# Altium PCB PCB2.PcbDoc
Units mil, origin at the board's own origin, x right, y up, seen from the top; angles counter-clockwise.
Board outline 2120 x 2135 mil, 4 copper layers (Top Layer, Mid-Layer 1, Mid-Layer 2, Bottom Layer); 57 components, 81 nets, 260 pads, 8 vias.
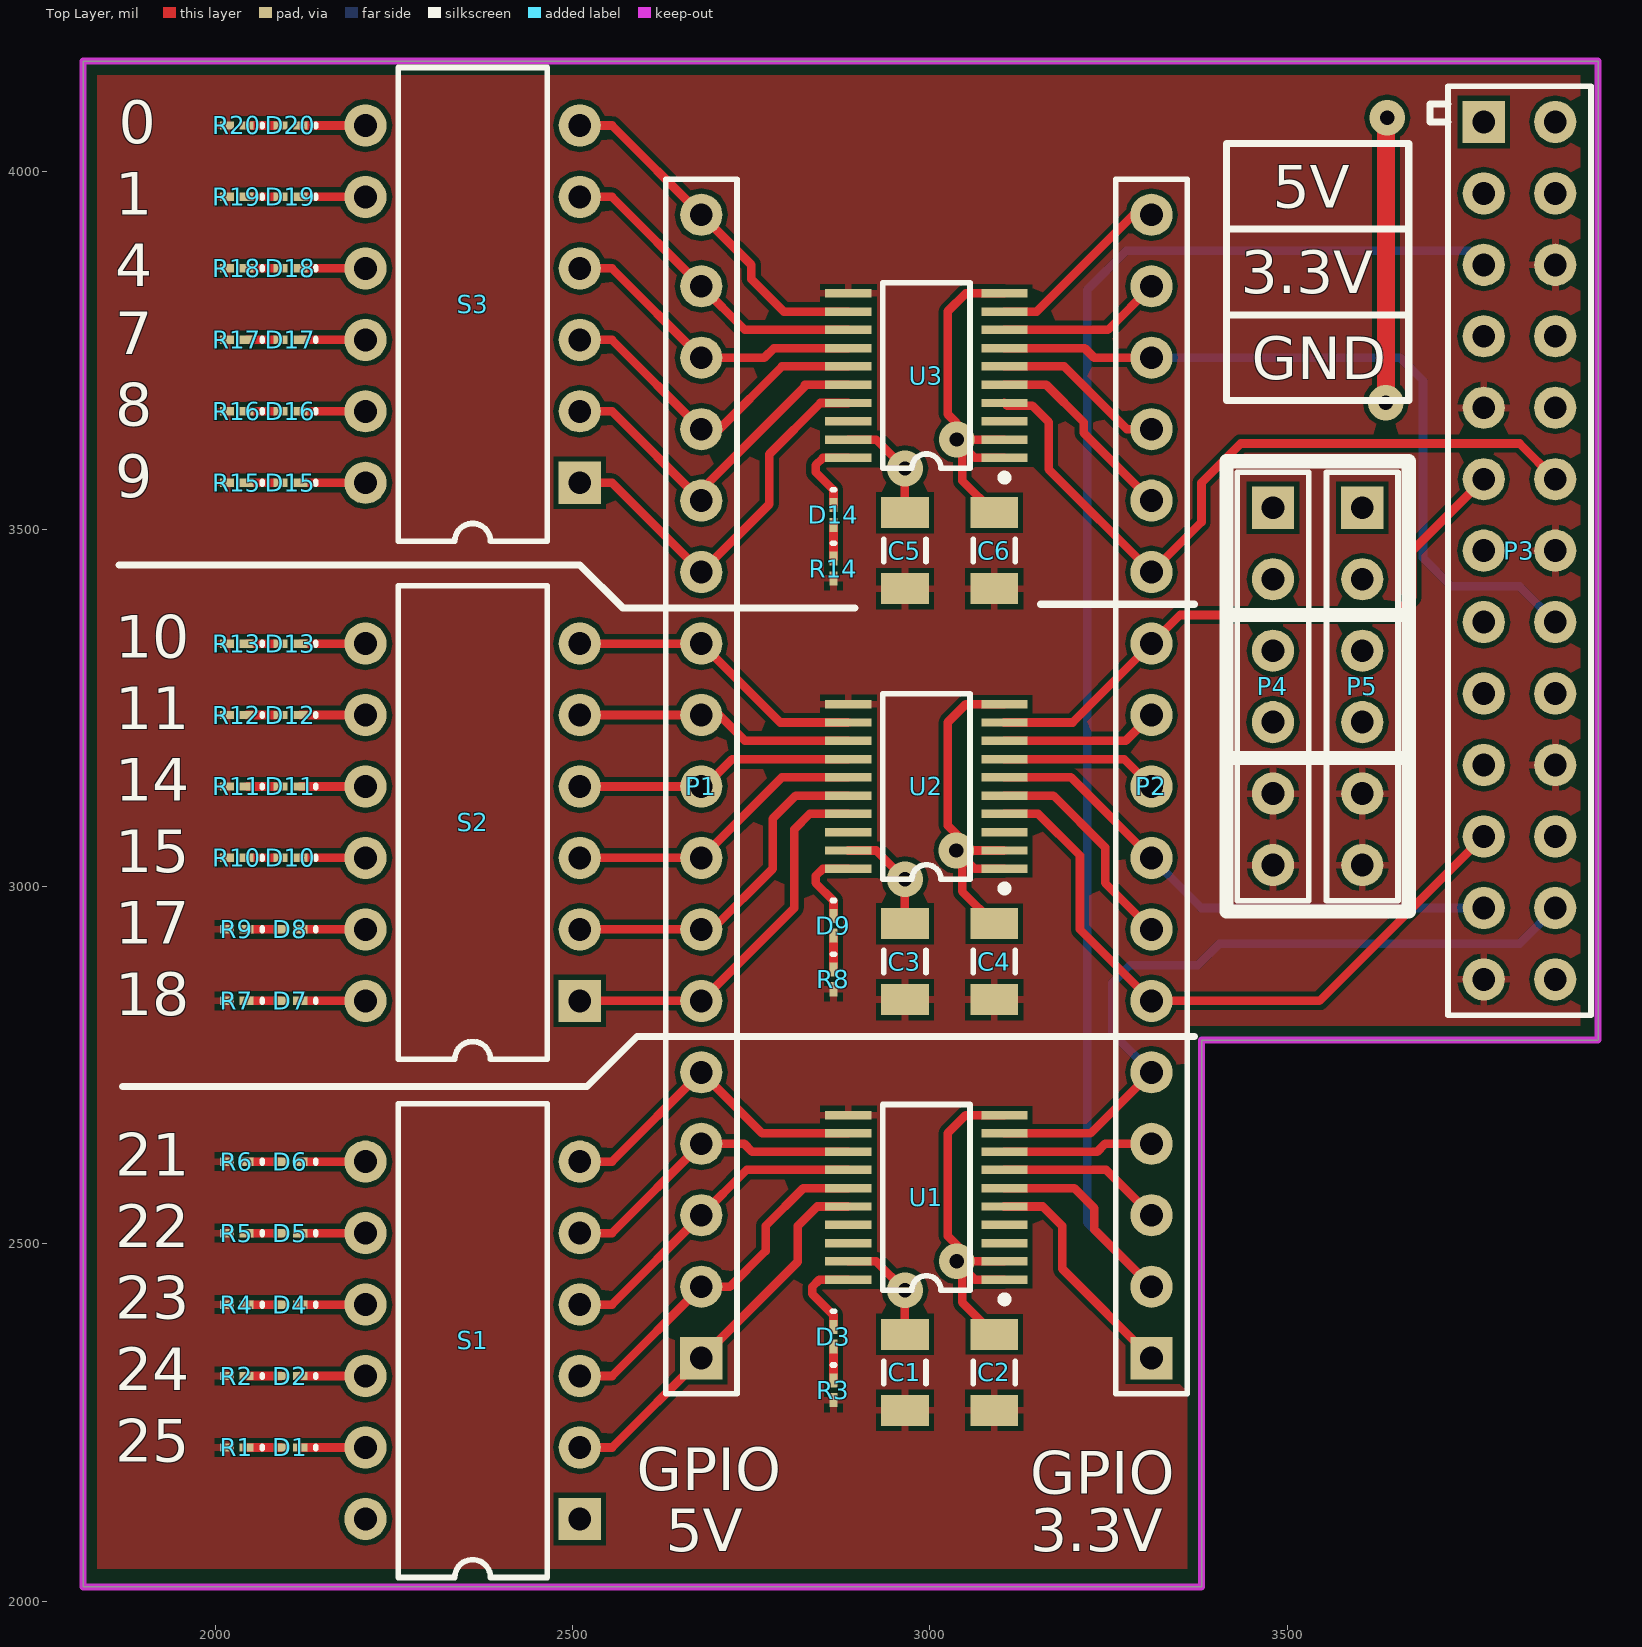
[diagram p0: Top Layer view]
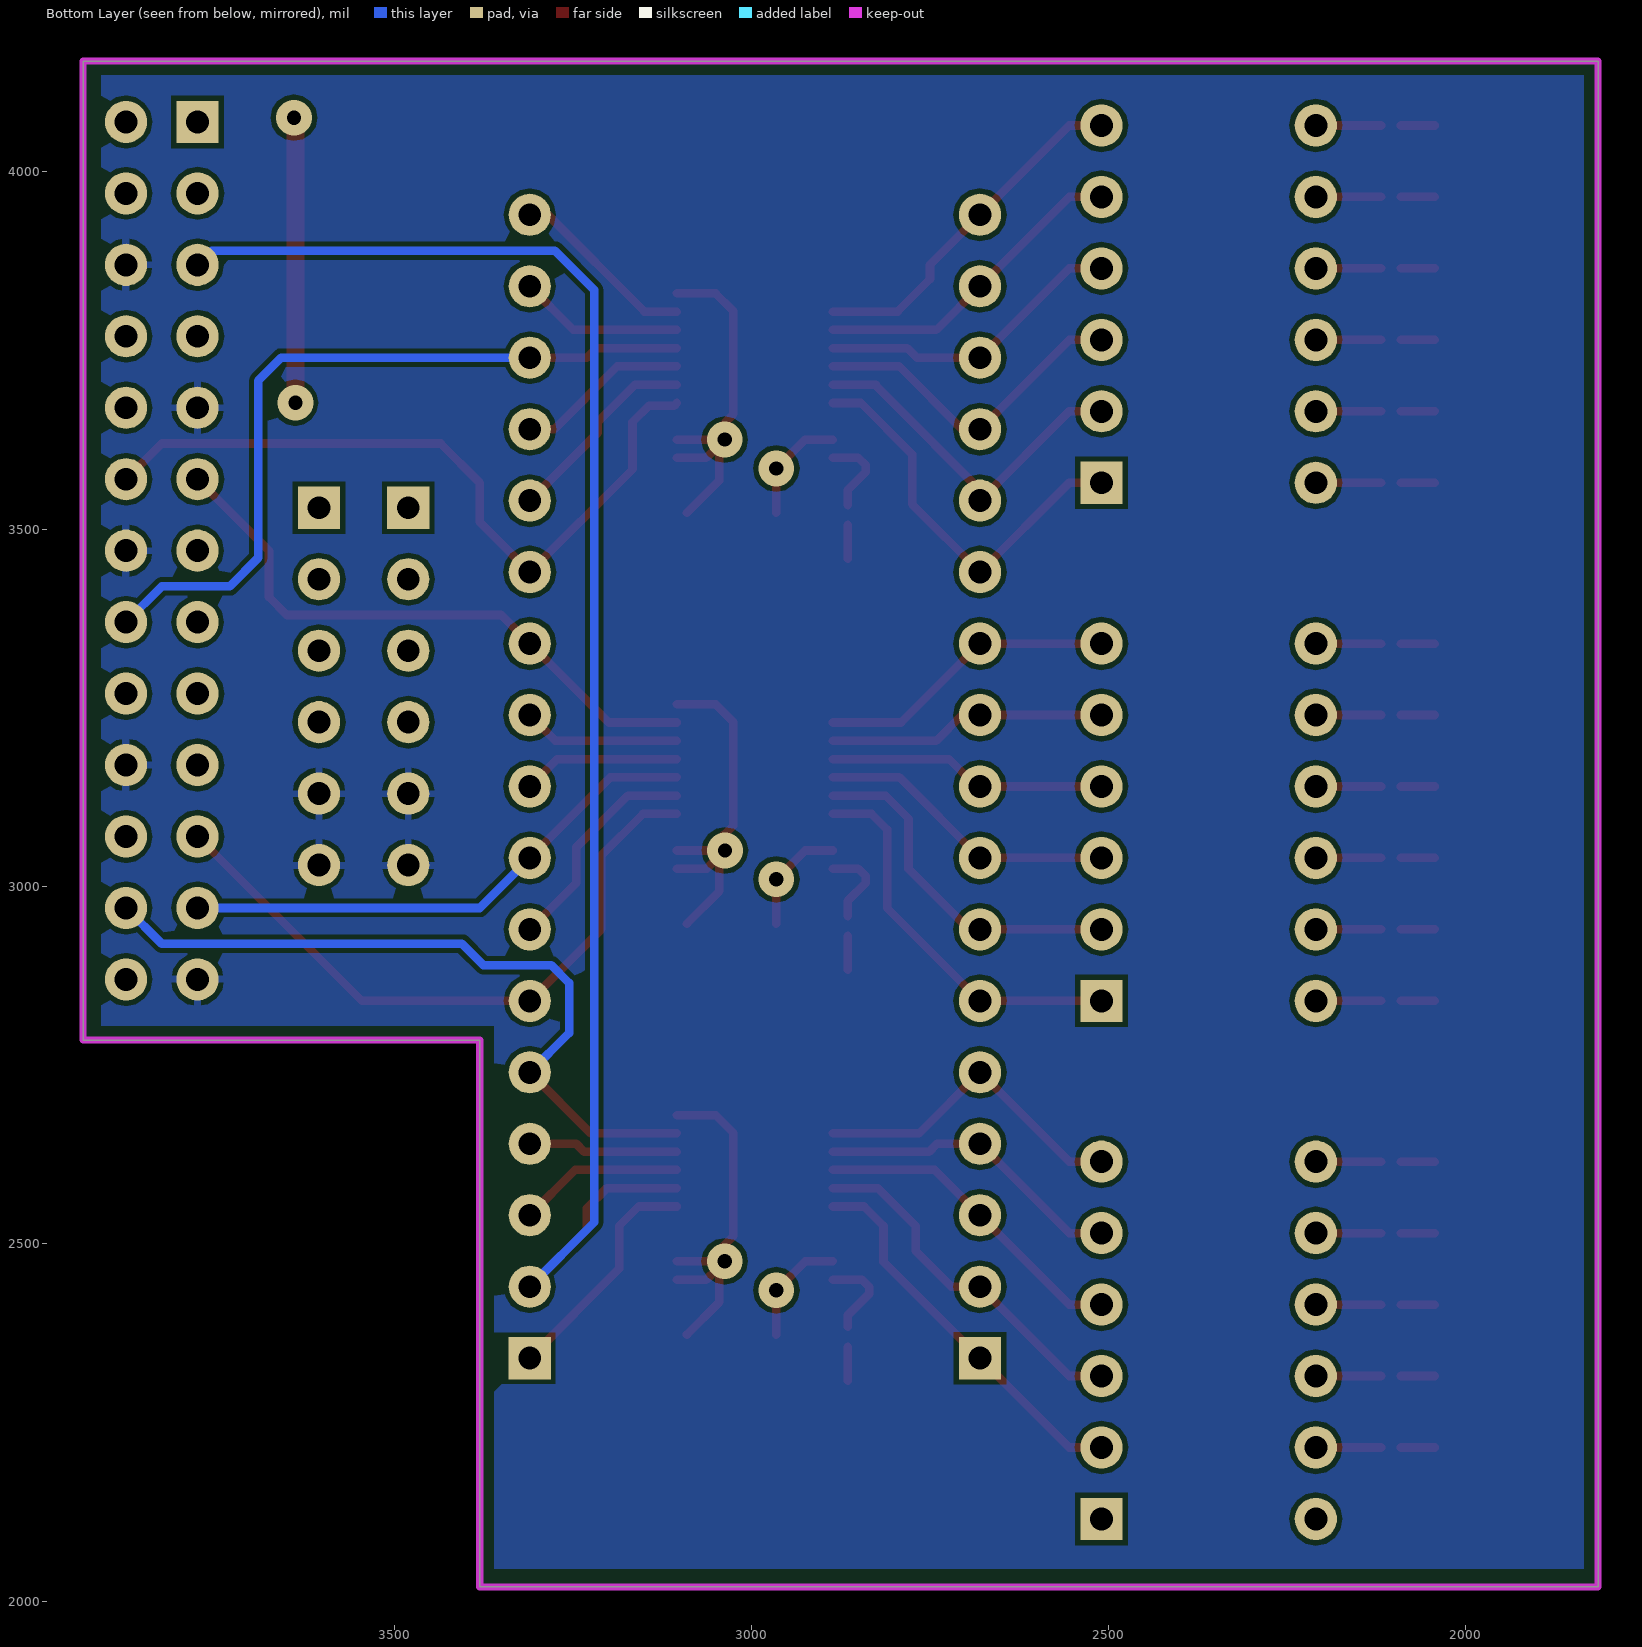
[diagram p1: Bottom Layer view, seen from below]
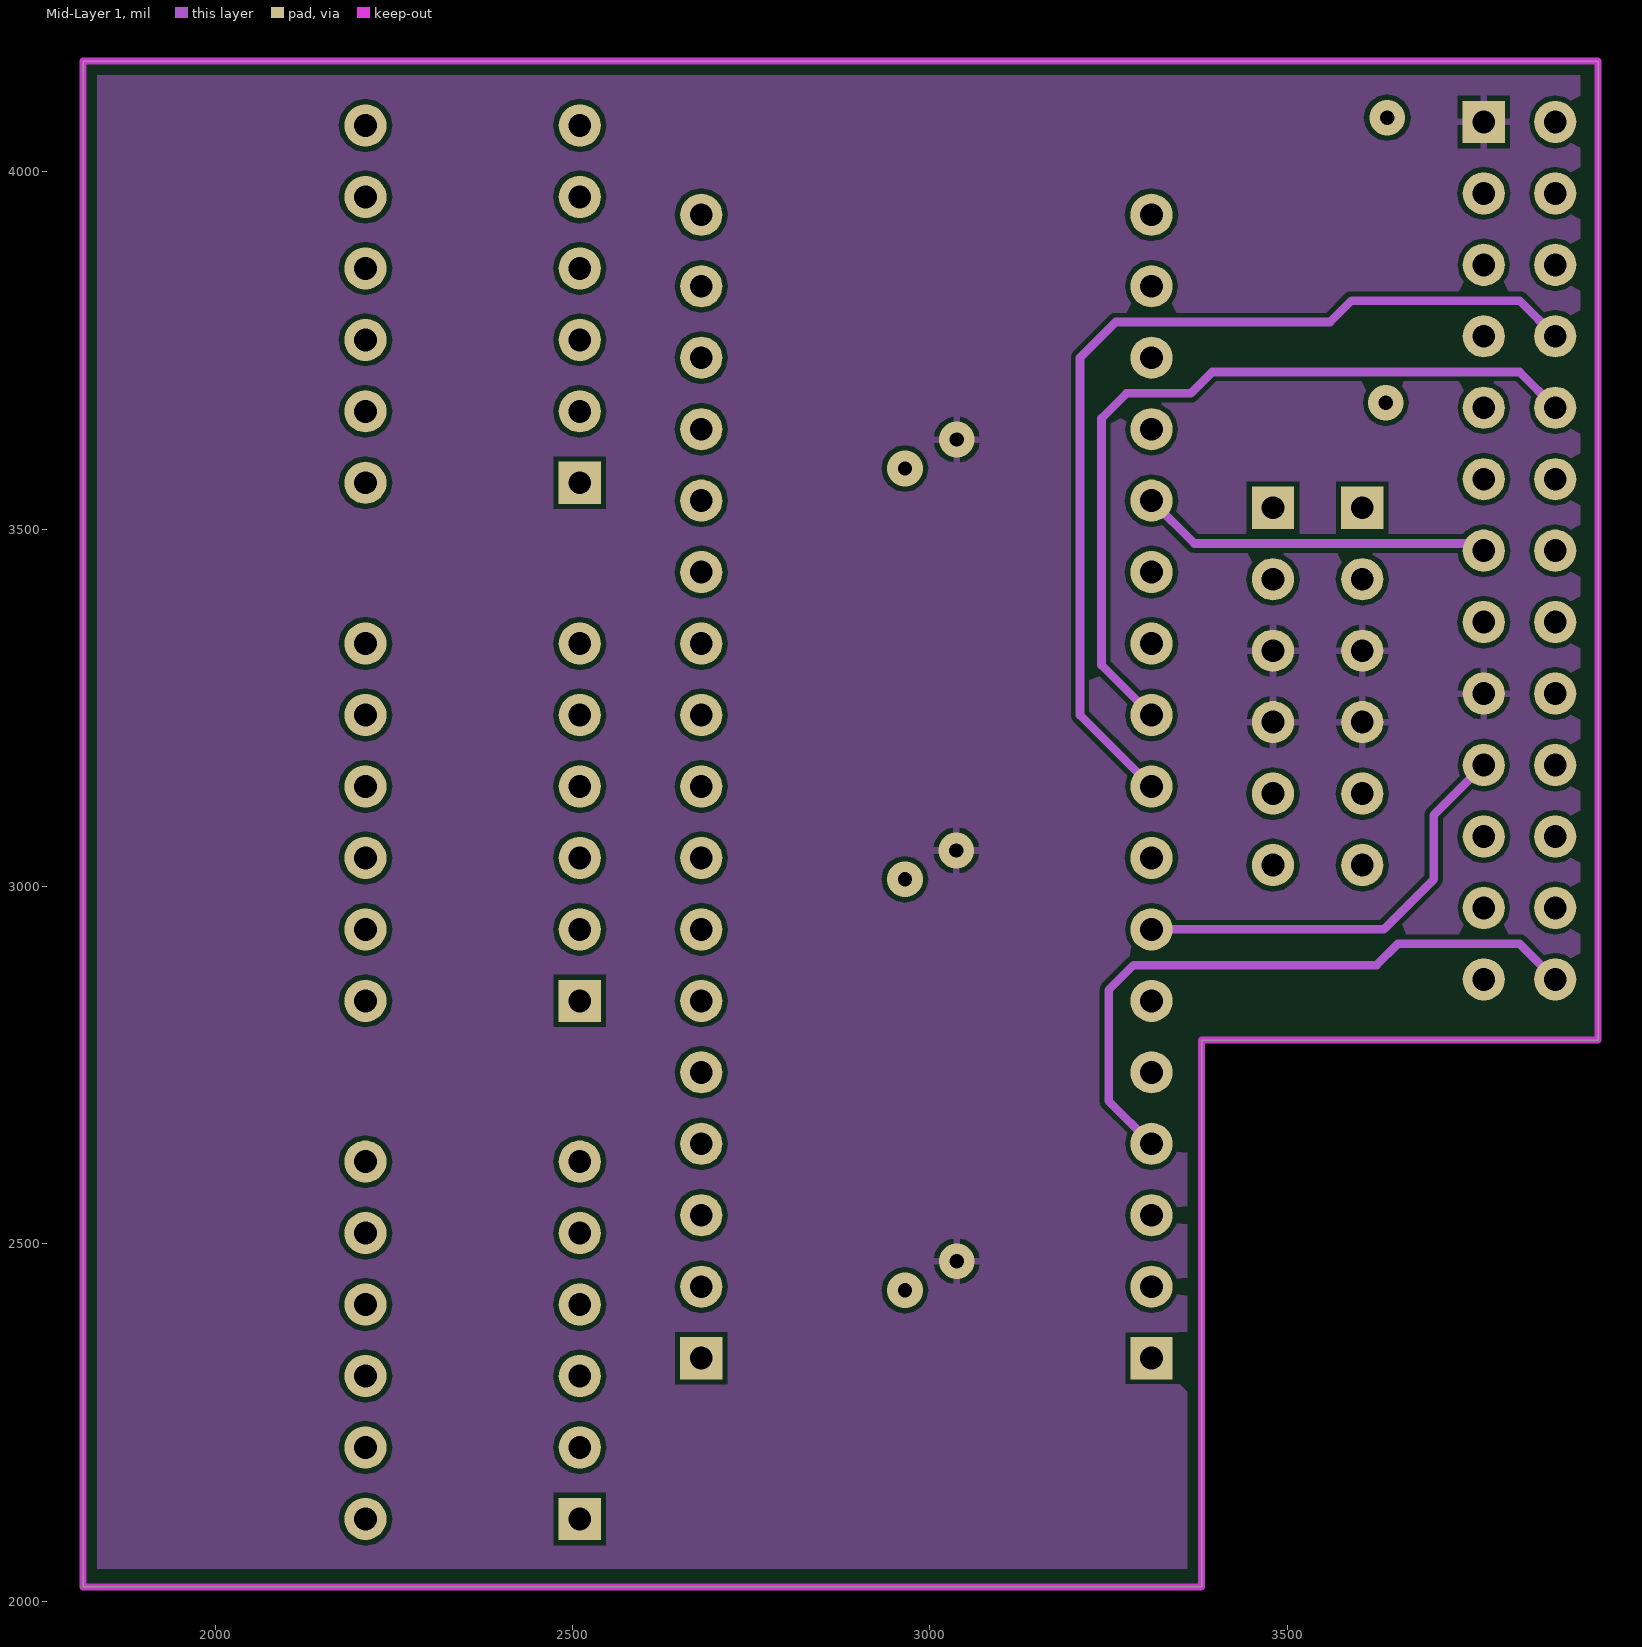
[diagram p2: Mid-Layer 1]
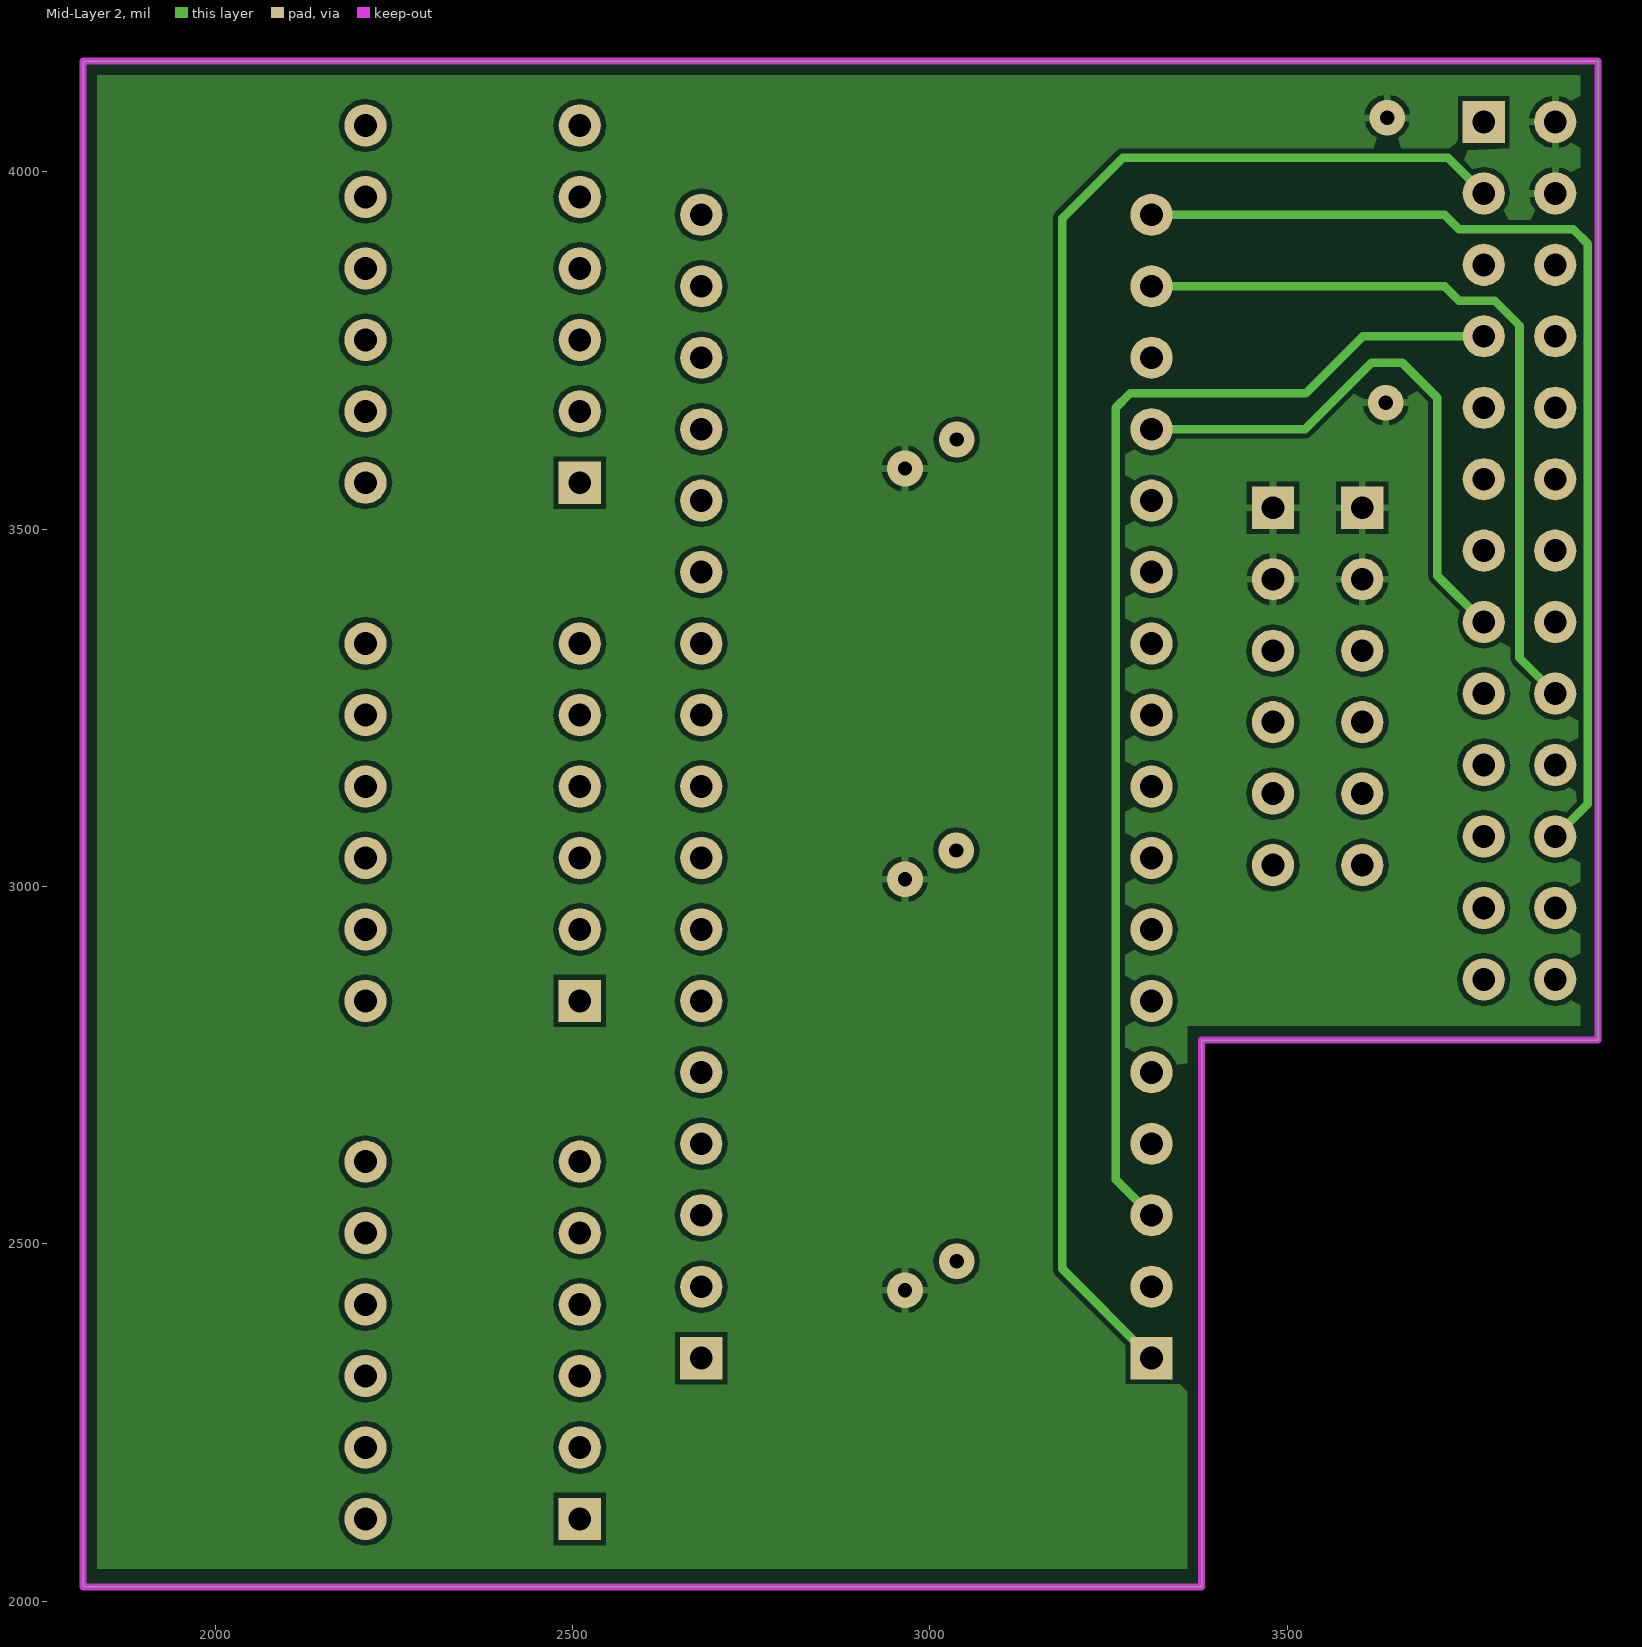
[diagram p3: Mid-Layer 2]

## Layer stack, top to bottom
Top Layer: signal copper 1.4
Dielectric: core 12.6, FR-4, Dk 4.8
Mid-Layer 1: signal copper 1.4
Dielectric: prepreg 12.6, FR-4, Dk 4.8
Mid-Layer 2: signal copper 1.4
Dielectric: core 12.6, FR-4, Dk 4.8
Bottom Layer: signal copper 1.4

## Board outline
3380,2020 3380,2785 3935,2785 3935,4155 1815,4155 1815,2020

## Design rules (kind name [scope] priority, off if disabled: settings)
Clearance [All] p1: gap=7
MinimumSolderMaskSliver [All] p1: minsoldermaskwidth=6
PolygonConnect [All] p1: connectstyle=Relief reliefconductorwidth=10 reliefentries=4 polygonreliefangle="90 Angle"
RoutingVias [All] p1: holewidth=28 width=50 viastyle="Through Hole" minholewidth=28 minwidth=50 maxholewidth=28 maxwidth=50
SilkscreenOverComponentPads [All] p1 off: minsilkscreentomaskgap=10
SolderMaskExpansion [All] p1: expansion=4
Width [All] p1: maxlimit=40 minlimit=9 preferedwidth=20
26 further rules are at their usual default settings.

## Components (designator, comment, footprint, x,y, rotation, side; value= is the part's Value field where it differs from the comment)
C1 "Cap Semi" C1206 2965,2320 r90 top
C2 "Cap Semi" C1206 3090,2320 r90 top
C3 "Cap Semi" C1206 2965,2895 r90 top
C4 "Cap Semi" C1206 3090,2895 r90 top
C5 "Cap Semi" C1206 2965,3470 r90 top
C6 "Cap Semi" C1206 3090,3470 r90 top
D1 "LED2" 0603 2105,2215 r180 top (schematic designator D2)
D2 "LED2" 0603 2105,2315 r180 top (schematic designator D3)
D3 "LED2" 0603 2865,2370 r270 top (schematic designator D1)
D4 "LED2" 0603 2105,2415 r180 top
D5 "LED2" 0603 2105,2515 r180 top
D6 "LED2" 0603 2105,2615 r180 top
D7 "LED2" 0603 2105,2840 r180 top (schematic designator D8)
D8 "LED2" 0603 2105,2940 r180 top (schematic designator D9)
D9 "LED2" 0603 2865,2945 r270 top (schematic designator D7)
D10 "LED2" 0603 2105,3040 r180 top
D11 "LED2" 0603 2105,3140 r180 top
D12 "LED2" 0603 2105,3240 r180 top
D13 "LED2" 0603 2105,3340 r180 top
D14 "LED2" 0603 2865,3520 r270 top (schematic designator D16)
D15 "LED2" 0603 2105,3565 r180 top (schematic designator D14)
D16 "LED2" 0603 2105,3665 r180 top (schematic designator D15)
D17 "LED2" 0603 2105,3765 r180 top
D18 "LED2" 0603 2105,3865 r180 top
D19 "LED2" 0603 2105,3965 r180 top
D20 "LED2" 0603 2105,4065 r180 top
P1 "Header 17" HDR1X17 2680,2340 r90 top (schematic designator P2)
P2 "Header 17" HDR1X17 3310,2340 r90 top (schematic designator P3)
P3 "Header 13X2" HDR2X13 3775,4070 r270 top (schematic designator P1)
P4 "Header 6" HDR1X6 3480,3530 r270 top
P5 "Header 6" HDR1X6 3605,3530 r270 top
R1 "Res1" 0603 2030,2215 r180 top (schematic designator R2)
R2 "Res1" 0603 2030,2315 r180 top (schematic designator R3)
R3 "Res1" 0603 2865,2295 r270 top (schematic designator R1)
R4 "Res1" 0603 2030,2415 r180 top
R5 "Res1" 0603 2030,2515 r180 top
R6 "Res1" 0603 2030,2615 r180 top
R7 "Res1" 0603 2030,2840 r180 top (schematic designator R8)
R8 "Res1" 0603 2865,2870 r270 top (schematic designator R7)
R9 "Res1" 0603 2030,2940 r180 top
R10 "Res1" 0603 2030,3040 r180 top
R11 "Res1" 0603 2030,3140 r180 top
R12 "Res1" 0603 2030,3240 r180 top
R13 "Res1" 0603 2030,3340 r180 top
R14 "Res1" 0603 2865,3445 r270 top (schematic designator R16)
R15 "Res1" 0603 2030,3565 r180 top (schematic designator R14)
R16 "Res1" 0603 2030,3665 r180 top (schematic designator R15)
R17 "Res1" 0603 2030,3765 r180 top
R18 "Res1" 0603 2030,3865 r180 top
R19 "Res1" 0603 2030,3965 r180 top
R20 "Res1" 0603 2030,4065 r180 top
S1 "SW DIP-6" DIP-12/SW 2360,2365 r90 top
S2 "SW DIP-6" DIP-12/SW 2360,3090 r90 top
S3 "SW DIP-6" DIP-12/SW 2360,3815 r90 top
U1 "SN74ABT245APW" PW020 2995,2565 r90 top
U2 "SN74ABT245APW" PW020 2995,3140 r90 top
U3 "SN74ABT245APW" PW020 2995,3715 r90 top

## Footprints (in the part's own frame and the unit in brackets; to place one, negate y for a bottom-side part, rotate by r counter-clockwise, add the part's x,y. Pads: shape width x height; smd on the part's side, far side on the other; paste and mask are expansions set on the pad)
0603 [mm] "Chip Inductor, Body 0.6x0.3mm, IPC High Density"
  rect 0.5x0.3 smd: 1(-0.35,0) 2(0.35,0)
  silkscreen extent -0.9,-0.05 -0.9,0.05, body extent -0.33,-0.18 0.33,0.18, height 0.55
C1206 [mm] "Chip Capacitor, Body 3.2x1.6mm, IPC High Density"
  rect 1.1x1.7 smd: 1(-1.35,0) 2(1.35,0)
  silkscreen extent -0.4,-0.75 0.4,0.75, body extent -1.7,-0.9 1.7,0.9, height 1.3
DIP-12/SW [mm] "DIP Switch; 12 Leads"
  rect 1.5x1.5 hole 0.813: 1(-6.35,-3.81)
  round 1.5 hole 0.813: 2(-3.81,-3.81) 3(-1.27,-3.81) 4(1.27,-3.81) 5(3.81,-3.81) 6(6.35,-3.81) 7(6.35,3.81) 8(3.81,3.81) 9(1.27,3.81) 10(-1.27,3.81) 11(-3.81,3.81) 12(-6.35,3.81)
  silkscreen extent -8.43,-2.65 8.41,2.65
HDR1X6 [mm] "Connector; Header; 6 Position"
  rect 1.5x1.5 hole 0.813: 1(0,0)
  round 1.5 hole 0.813: 2(2.54,0) 3(5.08,0) 4(7.62,0) 5(10.16,0) 6(12.7,0)
  silkscreen extent -1.27,-1.27 13.97,1.27
HDR1X17 [mm] "Connector; Header; 17 Position"
  rect 1.5x1.5 hole 0.813: 1(0,0)
  round 1.5 hole 0.813: 2(2.54,0) 3(5.08,0) 4(7.62,0) 5(10.16,0) 6(12.7,0) 7(15.24,0) 8(17.78,0) 9(20.32,0) 10(22.86,0) 11(25.4,0) 12(27.94,0) 13(30.48,0) 14(33.02,0) 15(35.56,0) 16(38.1,0) 17(40.64,0)
  silkscreen extent -1.27,-1.27 41.91,1.27
HDR2X13 [mm] "Connector; Header; 13x2 Position"
  rect 1.5x1.5 hole 0.813: 1(0,0)
  round 1.5 hole 0.813: 2(0,2.54) 3(2.54,0) 4(2.54,2.54) 5(5.08,0) 6(5.08,2.54) 7(7.62,0) 8(7.62,2.54) 9(10.16,0) 10(10.16,2.54) 11(12.7,0) 12(12.7,2.54) 13(15.24,0) 14(15.24,2.54) 15(17.78,0) 16(17.78,2.54) 17(20.32,0) 18(20.32,2.54) 19(22.86,0) 20(22.86,2.54) 21(25.4,0) 22(25.4,2.54) 23(27.94,0) 24(27.94,2.54) 25(30.48,0) 26(30.48,2.54)
  silkscreen extent -1.27,-1.27 31.75,3.81
PW020 [mm] "Shrink Small Outline; 20 Leads; Body Width 4.4 mm; Pitch 0.65 mm"
  rect 0.3x1.65 smd: 1(-2.925,-2.775) 2(-2.275,-2.775) 3(-1.625,-2.775) 4(-0.975,-2.775) 5(-0.325,-2.775) 6(0.325,-2.775) 7(0.975,-2.775) 8(1.625,-2.775) 9(2.275,-2.775) 10(2.925,-2.775) 11(2.925,2.775) 12(2.275,2.775) 13(1.625,2.775) 14(0.975,2.775) 15(0.325,2.775) 16(-0.325,2.775) 17(-0.975,2.775) 18(-1.625,2.775) 19(-2.275,2.775) 20(-2.925,2.775)
  silkscreen extent -3.75,-2.9 3.3,1.55

## Part data
C1 C2 C3 C4 C5 C6: "Capacitor (Semiconductor SIM Model)"
D1 D2 D3 D4 D5 D6 D7 D8 D9 D10 D11 D12 D13 D14 D15 D16 D17 D18 D19 D20: "Typical RED, GREEN, YELLOW, AMBER GaAs LED"
P1 P2: "Header, 17-Pin"
P3: "Header, 13-Pin, Dual row"
P4 P5: "Header, 6-Pin"
R1 R2 R3 R4 R5 R6 R7 R8 R9 R10 R11 R12 R13 R14 R15 R16 R17 R18 R19 R20: "Resistor"
S1 S2 S3: "DIP Switch, 6 Position, SPST"
U1 U2 U3: "Octal Bus Transceiver with 3-State Outputs"

## Via types
v1: diameter 50, hole 20, Top Layer to Bottom Layer, 8 vias

## Nets (pads, with @x,y where several pads share a name; then routed paths per layer and width w, separated by ;. In a path a pad name is that pad's centre, name@x,y a point inside that pad or via, vN(x,y) a via of type N, cw(c..) or ccw(c..) an arc to the next point about the centre after c; other vN are vias at no path point)
1: P1.1 S1.2 U1.16 | length 544.7
  Top Layer w12: S1.2 2555,2215 P1.1 2815,2475 2815,2525 2842.2,2552.2 U1.16
2: P1.2 S1.3 U1.15 | length 505.1
  Top Layer w12: S1.3 2555,2315 P1.2 2720,2440 2770,2490 2770,2525 2822.8,2577.8 U1.15
3: P1.3 S1.4 U1.14 | length 453.8
  Top Layer w12: S1.4 2555,2415 P1.3 2743.39,2603.39 U1.14
3V3: C2.2 C4.2 C6.2 P3.1 P3.17 P4.3 P4.4 P5.3 P5.4 U1.1 U1.2 U1.10 U2.1 U2.2 U2.10 U3.1 U3.2 U3.10 | length 1500.2
  Top Layer w12: v1(3036.93,3050.43) v1@3048.46,3038.9 ; v1(3037.36,2475.43) v1@3048.9,2463.9 ; v1(3037.36,3625.43) v1@3048.9,3613.9 ; v1@3048.46,3061.97 3025,3085.43 3025,3230 3050.16,3255.16 U2.10 ; v1@3048.9,2486.97 3025,2510.87 3025,2655 3050.16,2680.16 U1.10 ; v1@3048.9,3636.97 3025,3660.87 3025,3805 3050,3830 3104.09,3830 U3.10 ; v1@3060,3050.43 U2.2 ; v1@3060.43,2475.43 U1.2 ; v1@3060.43,3625.43 U3.2 ; C2.2 3045,2418.15 3045,2460 v1@3048.9,2463.9 ; C4.2 3045,2993.15 3045,3035.43 v1@3048.46,3038.9 ; C6.2 3045,3568.15 3045,3610 v1@3048.9,3613.9 ; U1.1 3062.95,2449.84 v1@3048.9,2463.9 ; U2.1 3062.52,3024.84 v1@3048.46,3038.9 ; U3.1 3062.95,3599.84 v1@3048.9,3613.9
4: P1.4 S1.5 U1.13 | length 432.1
  Top Layer w12: S1.5 2555,2515 P1.4 2740,2640 2751.02,2628.98 U1.13
5: P1.5 S1.6 U1.12 | length 462.9
  Top Layer w12: S1.6 2555,2615 P1.5 2765.43,2654.57 U1.12
5V: C1.2 C3.2 C5.2 P3.2 P3.4 P4.1 P4.2 P5.1 P5.2 U1.19 U2.19 U3.19 | length 861.6
  Top Layer w12: U1.19 2924.57,2475.43 v1(2965,2435) C1.2 ; U2.19 2924.57,3050.43 v1(2965,3010) C3.2 ; U3.19 2924.57,3625.43 v1(2965,3585) C5.2
  Top Layer w25: v1(3638,3677) v1@3638,4065
  other v1: 3640,4076
6: P1.6 S2.1 U2.17 | length 548.5
  Top Layer w12: S2.1 P1.6 2810,2970 2810,3080 2831.61,3101.61 U2.17
7: P1.7 S2.2 U2.16 | length 494.3
  Top Layer w12: S2.2 P1.7 2695,2940 2780,3025 2780,3095 2812.2,3127.2 U2.16
8: P1.8 S2.3 U2.15 | length 422.5
  Top Layer w12: S2.3 P1.8 2792.8,3152.8 U2.15
9: P1.9 S2.4 U2.14 | length 391.6
  Top Layer w12: S2.4 P1.9 2685,3140 2723.39,3178.39 U2.14
10: P1.10 S2.5 U2.13 | length 390.7
  Top Layer w12: S2.5 P1.10 2705,3240 2741.02,3203.98 U2.13
11: P1.11 S2.6 U2.12 | length 421.5
  Top Layer w12: S2.6 P1.11 2790.43,3229.57 U2.12
12: P1.12 S3.1 U3.17 | length 566.5
  Top Layer w12: S3.1 2555,3565 P1.12 2775,3535 2775,3605 2846.61,3676.61 U3.17
13: P1.13 S3.2 U3.16 | length 511.9
  Top Layer w12: S3.2 2555,3665 P1.13 ; P1.13@2662.8,3537.8 2825,3700 ; 2825,3702.2 U3.16
14: P1.14 S3.3 U3.15 | length 463.9
  Top Layer w12: S3.3 2555,3765 P1.14 2705,3640 2792.8,3727.8 U3.15
15: P1.15 S3.4 U3.14 | length 433.1
  Top Layer w12: S3.4 2555,3865 P1.15 2768.23,3740 2781.61,3753.39 U3.14
16: P1.16 S3.5 U3.13 | length 452.8
  Top Layer w12: S3.5 2555,3965 P1.16 2741.02,3778.98 U3.13
17: P1.17 S3.6 U3.12 | length 495.3
  Top Layer w12: S3.6 2555,4065 P1.17 2750,3870 2750,3850 2795.43,3804.57 U3.12
A2: U1.3
A3: U1.4
A4: P2.1 P3.3 U1.5 | length 2621.5
  Top Layer w12: U1.5 3157.8,2552.2 3185,2525 3185,2465 P2.1
  Mid-Layer 2 w12: P2.1 3185,2465 3185,3935 3270,4020 3725,4020 P3.3
A5: P2.2 P3.5 U1.6 | length 2298.7
  Top Layer w12: U1.6 3202.2,2577.8 3230,2550 3230,2520 P2.2
  Bottom Layer w12: P2.2 3220,2530 3220,3835 3275,3890 3755,3890 P3.5
A6: P2.3 P3.7 U1.7 | length 1939.1
  Top Layer w12: U1.7 3246.61,2603.39 P2.3
  Mid-Layer 2 w12: P2.3 3260,2590 3260,3670 3280,3690 3526,3690 3606,3770 P3.7
A7: P2.4 P3.26 U1.8 | length 1122.8
  Top Layer w12: U1.8 3233.98,2628.98 3245,2640 P2.4
  Mid-Layer 1 w12: P2.4 3250,2700 3250,2855 3285,2890 3625,2890 3655,2920 3825,2920 P3.26
A8: P2.5 P3.24 U1.9 | length 1052.4
  Top Layer w12: U1.9 3224.57,2654.57 P2.5
  Bottom Layer w12: P2.5 3255,2795 3255,2865 3280,2890 3375,2890 3405,2920 3825,2920 P3.24
B1: D3.1 U1.20 | length 123.3
  Top Layer w12: D3.1 2865,2400 2835,2430 2835,2439.68 2845.16,2449.84 U1.20
B2: U1.18
B3: U1.17
GND: C1.1 C2.1 C3.1 C4.1 C5.1 C6.1 P3.6 P3.9 P3.14 P3.20 P3.25 P4.5 P4.6 P5.5 P5.6 R1.2 R2.2 R3.2 R4.2 R5.2 R6.2 R7.2 R8.2 R9.2 R10.2 R11.2 R12.2 R13.2 R14.2 R15.2 R16.2 R17.2 R18.2 R19.2 R20.2 U1.11 U2.11 U3.11
GPIO9: P2.6 P3.21 U2.4 | length 934.9
  Top Layer w12: U2.4 3151.61,3101.61 3210,3043.23 3210,2940 P2.6 3545,2840 P3.21
GPIO10: P2.7 P3.19 U2.5 | length 925.6
  Top Layer w12: U2.5 3172.8,3127.2 3245,3055 3245,3005 P2.7
  Mid-Layer 1 w12: P2.7 3635,2940 3705,3010 3705,3100 P3.19
GPIO11: P2.8 P3.23 U2.6 | length 746.5
  Top Layer w12: U2.6 3197.2,3152.8 P2.8
  Bottom Layer w12: P2.8 3380,2970 P3.23
GPIO14: P2.9 P3.8 U2.7 | length 1581.9
  Top Layer w12: U2.7 3271.61,3178.39 P2.9
  Mid-Layer 1 w12: P2.9 3210,3240 3210,3740 3260,3790 3560,3790 3590,3820 3825,3820 P3.8
GPIO15: P2.10 P3.10 U2.8 | length 1347.3
  Top Layer w12: U2.8 3273.98,3203.98 P2.10
  Mid-Layer 1 w12: P2.10 3240,3310 3240,3655 3275,3690 3365,3690 3395,3720 3825,3720 P3.10
GPIO17: P2.11 P3.11 U2.9 | length 859.8
  Top Layer w12: U2.9 3199.57,3229.57 P2.11 3350,3380 3650,3380 3675,3405 3675,3470 P3.11
  Mid-Layer 1 w12: P3.11@3765,3570 P3.11
GPIO18: P2.12 P3.12 U3.4 | length 1035.1
  Top Layer w12: U3.4 3107.94,3672.93 3143.36,3672.93 3166.29,3650 3166.29,3583.71 P2.12 3380,3510 3380,3565 3435,3620 3825,3620 P3.12
GPIO21: P2.13 P3.13 U3.5 | length 775.7
  Top Layer w12: U3.5 3162.8,3702.2 3215,3650 3215,3635 P2.13
  Mid-Layer 1 w12: P2.13 3370,3480 3765,3480 P3.13
GPIO22: P2.14 P3.15 U3.6 | length 1041.9
  Top Layer w12: U3.6 3187.8,3727.8 3275.59,3640 P2.14
  Mid-Layer 2 w12: P2.14 3525,3640 3618,3733 3661,3733 3710,3684 3710,3435 P3.15
GPIO23: P2.15 P3.16 U3.7 | length 1074.8
  Top Layer w12: U3.7 3216.61,3753.39 3230,3740 P2.15
  Bottom Layer w12: P2.15 3658,3740 3690,3708 3690,3460 3730,3420 3825,3420 P3.16
GPIO24: P2.16 P3.18 U3.8 | length 1304.5
  Top Layer w12: U3.8 3248.98,3778.98 P2.16
  Mid-Layer 2 w12: P2.16 3720,3840 3740,3820 3790,3820 3825,3785 3825,3320 P3.18
GPIO25: P2.17 P3.22 U3.9 | length 1737.5
  Top Layer w12: U3.9 3149.57,3804.57 3285,3940 P2.17
  Mid-Layer 2 w12: P2.17 3720,3940 3740,3920 3900,3920 3920.53,3899.47 3920.53,3115.53 P3.22
NetD1_2: D3.2 R3.1 | length 47.4
  Top Layer w12: R3.1 D3.2
NetD2_1: D1.1 S1.11 | length 91.2
  Top Layer w12: D1.1 S1.11
NetD2_2: D1.2 R1.1 | length 47.4
  Top Layer w12: R1.1 D1.2
NetD3_1: D2.1 S1.10 | length 91.2
  Top Layer w12: D2.1 S1.10
NetD3_2: D2.2 R2.1 | length 47.4
  Top Layer w12: R2.1 D2.2
NetD4_1: D4.1 S1.9 | length 91.2
  Top Layer w12: D4.1 S1.9
NetD4_2: D4.2 R4.1 | length 47.4
  Top Layer w12: R4.1 D4.2
NetD5_1: D5.1 S1.8 | length 91.2
  Top Layer w12: D5.1 S1.8
NetD5_2: D5.2 R5.1 | length 47.4
  Top Layer w12: R5.1 D5.2
NetD6_1: D6.1 S1.7 | length 91.2
  Top Layer w12: D6.1 S1.7
NetD6_2: D6.2 R6.1 | length 47.4
  Top Layer w12: R6.1 D6.2
NetD7_1: D9.1 U2.20 | length 116.2
  Top Layer w12: D9.1 2865,2980 2840,3005 2840,3014.68 2850.16,3024.84 U2.20
NetD7_2: D9.2 R8.1 | length 47.4
  Top Layer w12: R8.1 D9.2
NetD8_1: D7.1 S2.12 | length 91.2
  Top Layer w12: D7.1 S2.12
NetD8_2: D7.2 R7.1 | length 47.4
  Top Layer w12: R7.1 D7.2
NetD9_1: D8.1 S2.11 | length 91.2
  Top Layer w12: D8.1 S2.11
NetD9_2: D8.2 R9.1 | length 47.4
  Top Layer w12: R9.1 D8.2
NetD10_1: D10.1 S2.10 | length 91.2
  Top Layer w12: D10.1 S2.10
NetD10_2: D10.2 R10.1 | length 47.4
  Top Layer w12: R10.1 D10.2
NetD11_1: D11.1 S2.9 | length 91.2
  Top Layer w12: D11.1 S2.9
NetD11_2: D11.2 R11.1 | length 47.4
  Top Layer w12: R11.1 D11.2
NetD12_1: D12.1 S2.8 | length 91.2
  Top Layer w12: D12.1 S2.8
NetD12_2: D12.2 R12.1 | length 47.4
  Top Layer w12: R12.1 D12.2
NetD13_1: D13.1 S2.7 | length 91.2
  Top Layer w12: D13.1 S2.7
NetD13_2: D13.2 R13.1 | length 47.4
  Top Layer w12: R13.1 D13.2
NetD14_1: D15.1 S3.12 | length 91.2
  Top Layer w12: D15.1 S3.12
NetD14_2: D15.2 R15.1 | length 47.4
  Top Layer w12: R15.1 D15.2
NetD15_1: D16.1 S3.11 | length 91.2
  Top Layer w12: D16.1 S3.11
NetD15_2: D16.2 R16.1 | length 47.4
  Top Layer w12: R16.1 D16.2
NetD16_1: D14.1 U3.20 | length 116.2
  Top Layer w12: D14.1 2865,3555 2840,3580 2840,3589.68 2850.16,3599.84 U3.20
NetD16_2: D14.2 R14.1 | length 47.4
  Top Layer w12: R14.1 D14.2
NetD17_1: D17.1 S3.10 | length 91.2
  Top Layer w12: D17.1 S3.10
NetD17_2: D17.2 R17.1 | length 47.4
  Top Layer w12: R17.1 D17.2
NetD18_1: D18.1 S3.9 | length 91.2
  Top Layer w12: D18.1 S3.9
NetD18_2: D18.2 R18.1 | length 47.4
  Top Layer w12: R18.1 D18.2
NetD19_1: D19.1 S3.8 | length 91.2
  Top Layer w12: D19.1 S3.8
NetD19_2: D19.2 R19.1 | length 47.4
  Top Layer w12: R19.1 D19.2
NetD20_1: D20.1 S3.7 | length 91.2
  Top Layer w12: D20.1 S3.7
NetD20_2: D20.2 R20.1 | length 47.4
  Top Layer w12: R20.1 D20.2
pads on no net: S1.1 S1.12 U2.3 U2.18 U3.3 U3.18

## Polygon pours and split planes (outlines as drawn)
GND on Top Layer "Bottom Layer-No Net" (solid, remove dead copper, pour order 4): 1835,2045 3360,2045 3360,2805 3910,2805 3910,4135 1835,4135
3V3 on Mid-Layer 1 "2_3V3" (solid, remove dead copper, pour order 4): 1835,2045 3360,2045 3360,2805 3910,2805 3910,4135 1835,4135
5V on Mid-Layer 2 "3_5V" (solid, remove dead copper, pour order 4): 1835,2045 3360,2045 3360,2805 3910,2805 3910,4135 1835,4135
GND on Bottom Layer "4_GND" (solid, remove dead copper, pour order 4): 1835,2045 3360,2045 3360,2805 3910,2805 3910,4135 1835,4135

## Keep-outs
Keep-Out Layer:
  lines w10: 1815,2020 1815,4155 2275,4155 3935,4155 3935,2785 3380,2785 3380,2045 3380,2020 1815,2020

## Silkscreen, mask and mechanical layers (free items; w line width, h text height)
Top Overlay:
  lines w10: 1865,3450 2510,3450 2570,3390 2895,3390 ; 1870,2720 2520,2720 2590,2790 3370,2790 ; 3155,3395 3370,3395 ; 3415,3800 3670,3800 ; 3415,3920 3670,3920 ; 3725,4070 3700,4070 3700,4095 3725,4095 ; 3415,3680 3670,3680 3670,4040 3415,4040 3415,3680
  lines w20: 3415,3180 3670,3180 ; 3415,3380 3670,3380 ; 3415,2965 3670,2965 3670,3595 3415,3595 3415,2965
  text "0" at 1865,4040 h60
  text "5V" at 3480,3950 h60
  text "1" at 1860,3940 h60
  text "4" at 1860,3840 h60
  text "3.3V" at 3435,3830 h60
  text "7" at 1860,3745 h60
  text "GND" at 3450,3710 h60
  text "8" at 1860,3645 h60
  text "9" at 1860,3545 h60
  text "10" at 1860,3320 h60
  text "11" at 1860,3220 h60
  text "14" at 1860,3120 h60
  text "15" at 1860,3020 h60
  text "17" at 1860,2920 h60
  text "18" at 1860,2820 h60
  text "21" at 1860,2595 h60
  text "22" at 1860,2495 h60
  text "23" at 1860,2395 h60
  text "24" at 1860,2295 h60
  text "25" at 1860,2195 h60
  text "GPIO" at 2590,2155 h60
  text "GPIO" at 3140,2150 h60
  text "5V" at 2630,2070 h60
  text "3.3V" at 3140,2070 h60